# EAGLE board Soldering StationV2 (EAGLE 9.5.2)
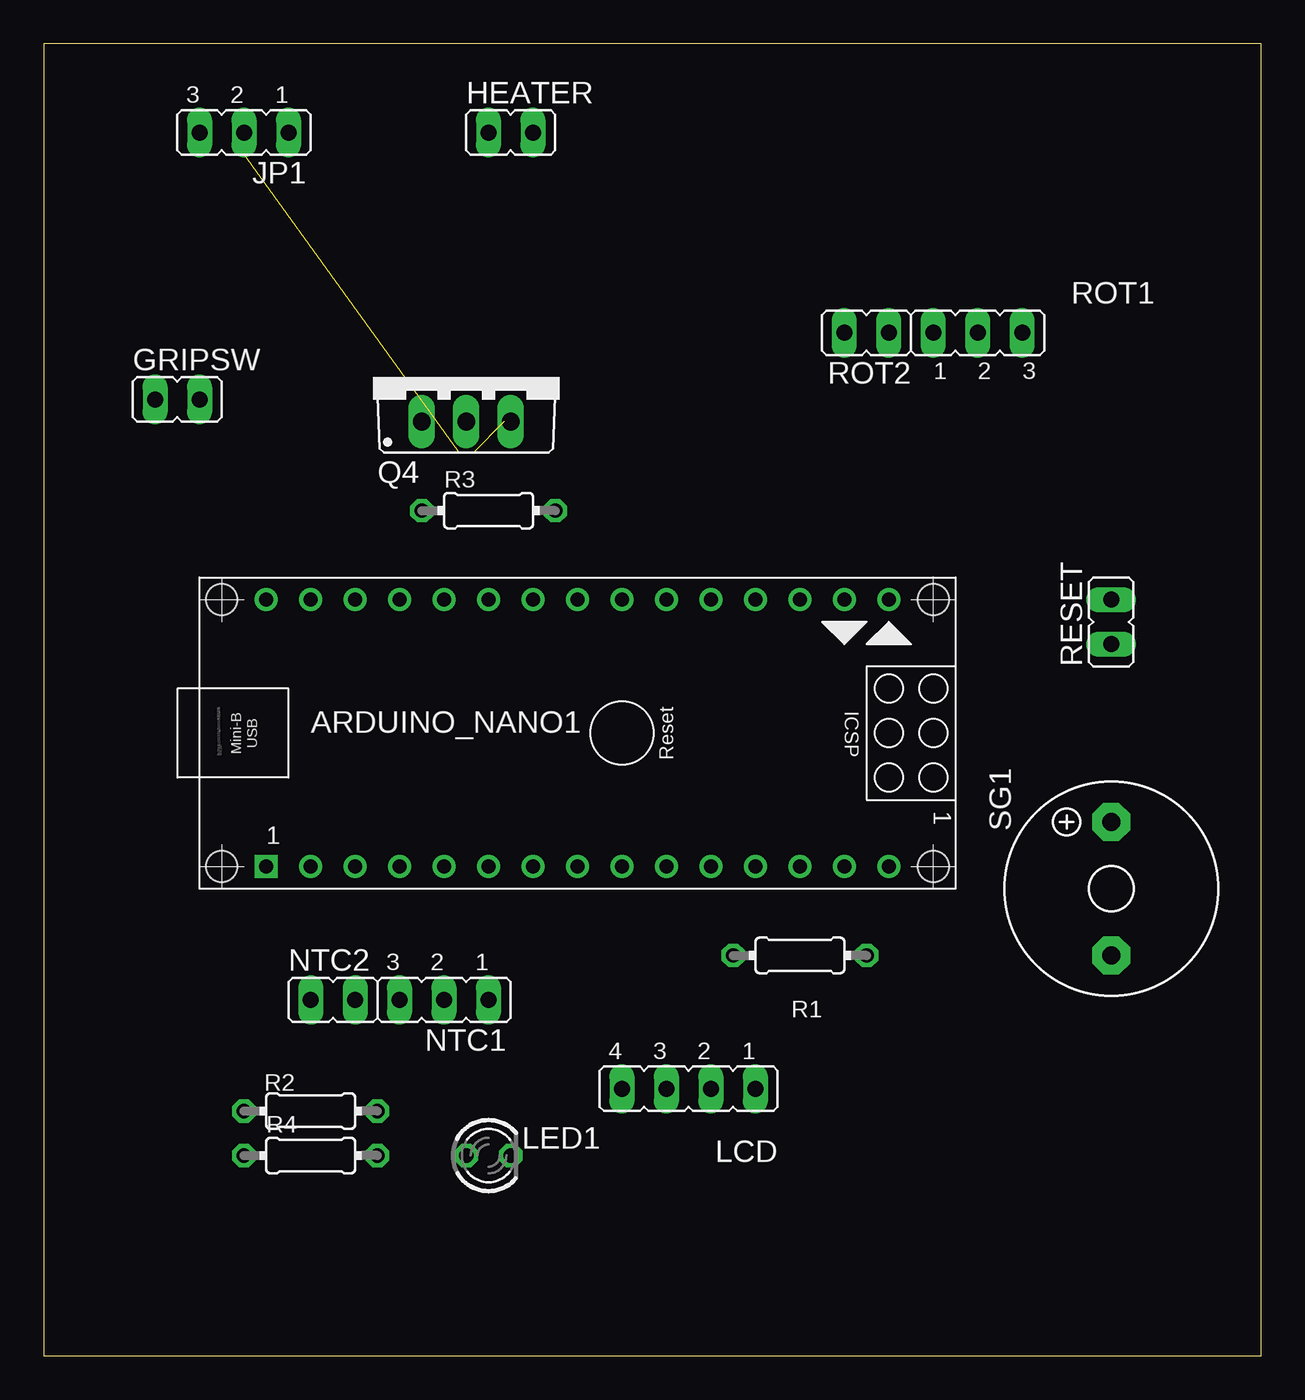
[diagram p0: board, top side]
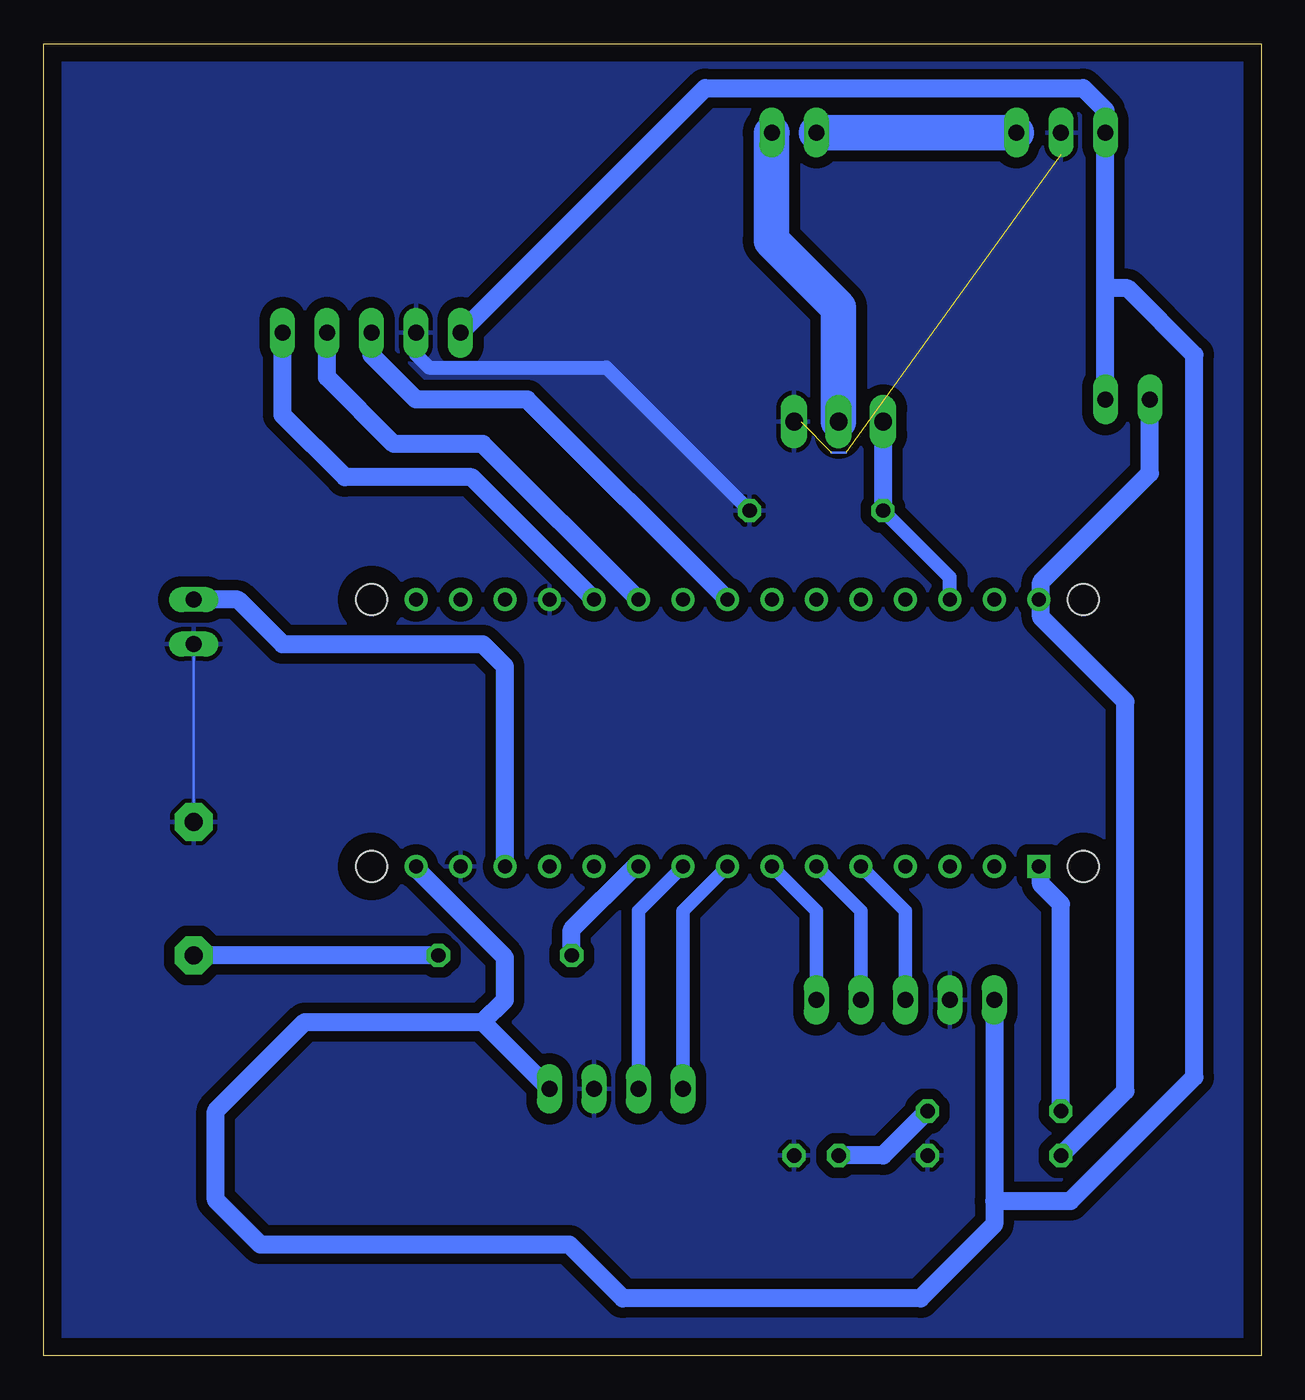
[diagram p1: board, bottom side, seen from below]

Size 69.52 x 74.92 mm. Coordinates in mm from the lower left corner, seen from the top.
Outline: 0,0 69.52,0 69.52,74.92 0,74.92 0,0
Copper layers (1*16): Top 0.035mm / dielectric 1.5mm / Bottom 0.035mm
Design rules "default": minimum track width 6mil, minimum drill 0.35mm, track to track 6mil, track to pad 6mil, pad to pad 6mil, via to via 6mil, smd to smd 6mil, copper to edge 40mil, drill to drill 6mil, minimum pad ring 10mil, minimum via ring 8mil, stop-mask expansion 4mil, vias tented up to drill 0mil, thermal gap 10mil

## Footprints (pad centres in the part's own frame; a part is rotated, then mirrored left to right if it is on the bottom)
ARDUINO_NANO = drill 0.8 square: 1 -20.32,-7.62 | drill 0.8: 2 -17.78,-7.62; 3 -15.24,-7.62; 4 -12.7,-7.62; 5 -10.16,-7.62; 6 -7.62,-7.62; 7 -5.08,-7.62; 8 -2.54,-7.62; 9 0,-7.62; 10 2.54,-7.62; 11 5.08,-7.62; 12 7.62,-7.62; 13 10.16,-7.62; 14 12.7,-7.62; 15 15.24,-7.62; 16 15.24,7.62; 17 12.7,7.62; 18 10.16,7.62; 19 7.62,7.62; 20 5.08,7.62; 21 2.54,7.62; 22 0,7.62; 23 -2.54,7.62; 24 -5.08,7.62; 25 -7.62,7.62; 26 -10.16,7.62; 27 -12.7,7.62; 28 -15.24,7.62; 29 -17.78,7.62; 30 -20.32,7.62 | hole 1.778: -22.86,-7.62; -22.86,7.62; 17.78,7.62; 17.78,-7.62
JP1 = drill 0.914 long: 1 0,-1.27; 2 0,1.27
JP2 = drill 0.914 long: 1 -2.54,0; 2 0,0; 3 2.54,0
JP4 = drill 0.914 long: 1 -3.81,0; 2 -1.27,0; 3 1.27,0; 4 3.81,0
LED3MM = drill 0.813 octagon: A -1.27,0; K 1.27,0
TO220BV = drill 1.016 long: D 0,-2.54; G -2.54,-2.54; S 2.54,-2.54
0204/7 = drill 0.813 octagon: 1 -3.81,0; 2 3.81,0
F/TMB = drill 1.016 pad 2.159 octagon: + 3.81,0; - -3.81,0

## Placement (x,y rotation side)
ARDUINO_NANO1  [ARDUINO_NANO]  33.02,35.56 0 top
GRIPSW  [JP1]  7.62,54.61 270 top
HEATER  794681-2  [JP1]  26.67,69.85 270 top
JP1  [JP2]  11.43,69.85 180 top
LCD  [JP4]  36.83,15.24 180 top
LED1  [LED3MM]  25.4,11.43 0 top
NTC1  [JP2]  22.86,20.32 180 top
NTC2  [JP1]  16.51,20.32 270 top
Q4  IRLB8721  [TO220BV]  24.13,55.88 0 top
R1  1K  [0204/7]  43.18,22.86 180 top
R2  1K  [0204/7]  15.24,13.97 180 top
R3  4.7k  [0204/7]  25.4,48.26 0 top
R4  4.7k  [0204/7]  15.24,11.43 0 top
RESET  [JP1]  60.96,41.91 0 top
ROT1  [JP2]  53.34,58.42 0 top
ROT2  [JP1]  46.99,58.42 90 top
SG1  F/TMB  [F/TMB]  60.96,26.67 90 top

## Library data of the parts
ARDUINO_NANO1 = ArduinoNanoV30
GRIPSW HEATER JP1 LCD NTC1 NTC2 RESET ROT1 ROT2 = jumper
LED1 = led
Q4 = transistor-power
R1-R4 = rcl; SPICEPREFIX: L
SG1 = buzzer; OC_FARNELL: unknown; OC_NEWARK: unknown

## Nets
5V: ARDUINO_NANO1.12
+5V: ARDUINO_NANO1.15 GRIPSW.2 JP1.3 LCD.1 NTC2.1 ROT2.2
+24V: HEATER.1 JP1.1
BUZZER: ARDUINO_NANO1.10 R1.2
GND: ARDUINO_NANO1.14 ARDUINO_NANO1.19 JP1.2 LCD.2 LED1.K NTC2.2 Q4.S R3.2 R4.2 RESET.1 ROT2.1 SG1.+
LED [New Class]: ARDUINO_NANO1.1 R2.2
N$1: ARDUINO_NANO1.28 Q4.G R3.1
N$2: ARDUINO_NANO1.21 ROT1.2
N$3: R1.1 SG1.-
N$4: LED1.A R2.1
N$5: ARDUINO_NANO1.30 GRIPSW.1 R4.1
N$6: ARDUINO_NANO1.20 ROT1.3
N$7: ARDUINO_NANO1.5 NTC1.3
N$8: ARDUINO_NANO1.6 NTC1.2
N$9: HEATER.2 Q4.D
N$10: ARDUINO_NANO1.9 LCD.3
N$11: ARDUINO_NANO1.8 LCD.4
N$12: ARDUINO_NANO1.7 NTC1.1
N$13: ARDUINO_NANO1.23 ROT1.1
RESET: ARDUINO_NANO1.13 RESET.2

## Tracks (layer width: path | path; a pad name or v marks a point on that pad's centre or on a via)
+5V
  Bottom 0.762: 48.26,27.81 ARDUINO_NANO1.15
  Bottom 1.016: 44.45,19.05 54.61,19.05 59.69,13.97 59.69,8.89 57.15,6.35 39.52,6.35 36.45,3.28 19.46,3.28 15.24,7.49 15.24,8.84 | 44.45,19.05 43.18,20.32 43.18,22.73 48.26,27.81 | LCD.1 44.45,19.05 | NTC2.1 15.24,8.84 | GRIPSW.2 8.89,60.96 | 8.89,60.96 JP1.3 8.89,71.12 10.16,72.39 31.75,72.39 ROT2.2 | 15.24,8.84 10.88,8.84 3.81,15.91 3.81,57.15 7.62,60.96 8.89,60.96
+24V
  Bottom 2.032: HEATER.1 JP1.1
BUZZER
  Bottom 1.016: R1.2 39.37,24.33 35.76,27.94 ARDUINO_NANO1.10
GND  (2 unrouted)
  Bottom 0.152: SG1.+ RESET.1 | 29.6,47.87 R3.2 | 11.43,68.58 JP1.2 | 24.54,51.59 23.72,51.59 | Q4.S 26.29,53.34
  Bottom 0.813: ROT2.1 48.26,57.18 47.52,56.44 37.39,56.44 R3.2
  pour Bottom (isolate 0.61): 0,74.93 69.85,74.93 69.85,0 0,0
LED
  Bottom 1.016: R2.2 11.43,25.8 12.57,26.94 12.57,27.81 ARDUINO_NANO1.1
N$1
  Bottom 0.813: ARDUINO_NANO1.28 17.78,44.45 R3.1
  Bottom 1.016: Q4.G R3.1
N$2
  Bottom 1.016: ARDUINO_NANO1.21 44.45,52.07 49.53,52.07 53.34,55.88 ROT1.2
N$3
  Bottom 1.016: R1.1 SG1.-
N$4
  Bottom 1.016: LED1.A 21.59,11.43 R2.1
N$5
  Bottom 1.016: GRIPSW.1 6.35,50.4 12.57,44.18 12.57,43.31 ARDUINO_NANO1.30 12.57,43.05 12.57,42.18 7.75,37.35 7.75,15.11 R4.1
N$6
  Bottom 1.016: ARDUINO_NANO1.20 45.08,50.16 52.32,50.16 55.88,53.72 ROT1.3
N$7
  Bottom 0.762: ARDUINO_NANO1.5 20.32,25.4 NTC1.3
N$8
  Bottom 0.762: ARDUINO_NANO1.6 22.86,25.4 NTC1.2
N$9
  Bottom 2.032: HEATER.2 27.96,69.83 27.96,63.68 24.13,59.84 Q4.D
N$10
  Bottom 0.762: ARDUINO_NANO1.9 35.56,25.4 LCD.3
N$11
  Bottom 0.762: ARDUINO_NANO1.8 33.02,25.4 LCD.4
N$12
  Bottom 0.762: ARDUINO_NANO1.7 25.4,25.4 NTC1.1
N$13
  Bottom 1.016: ARDUINO_NANO1.23 41.91,54.61 48.26,54.61 50.8,57.15 ROT1.1
RESET
  Bottom 1.016: ARDUINO_NANO1.13 43.18,39.37 44.45,40.64 55.88,40.64 58.42,43.18 RESET.2